# Altium PCB LED_ring.PcbDoc
Units mm, origin at the board's own origin, x right, y up, seen from the top; angles counter-clockwise.
Board outline 53 x 53 mm, 4 copper layers (Component Side, Ground Plane, Power Plane, Solder Side), stack 0.575 mm thick; 20 components, 16 nets, 135 pads, 5 vias.
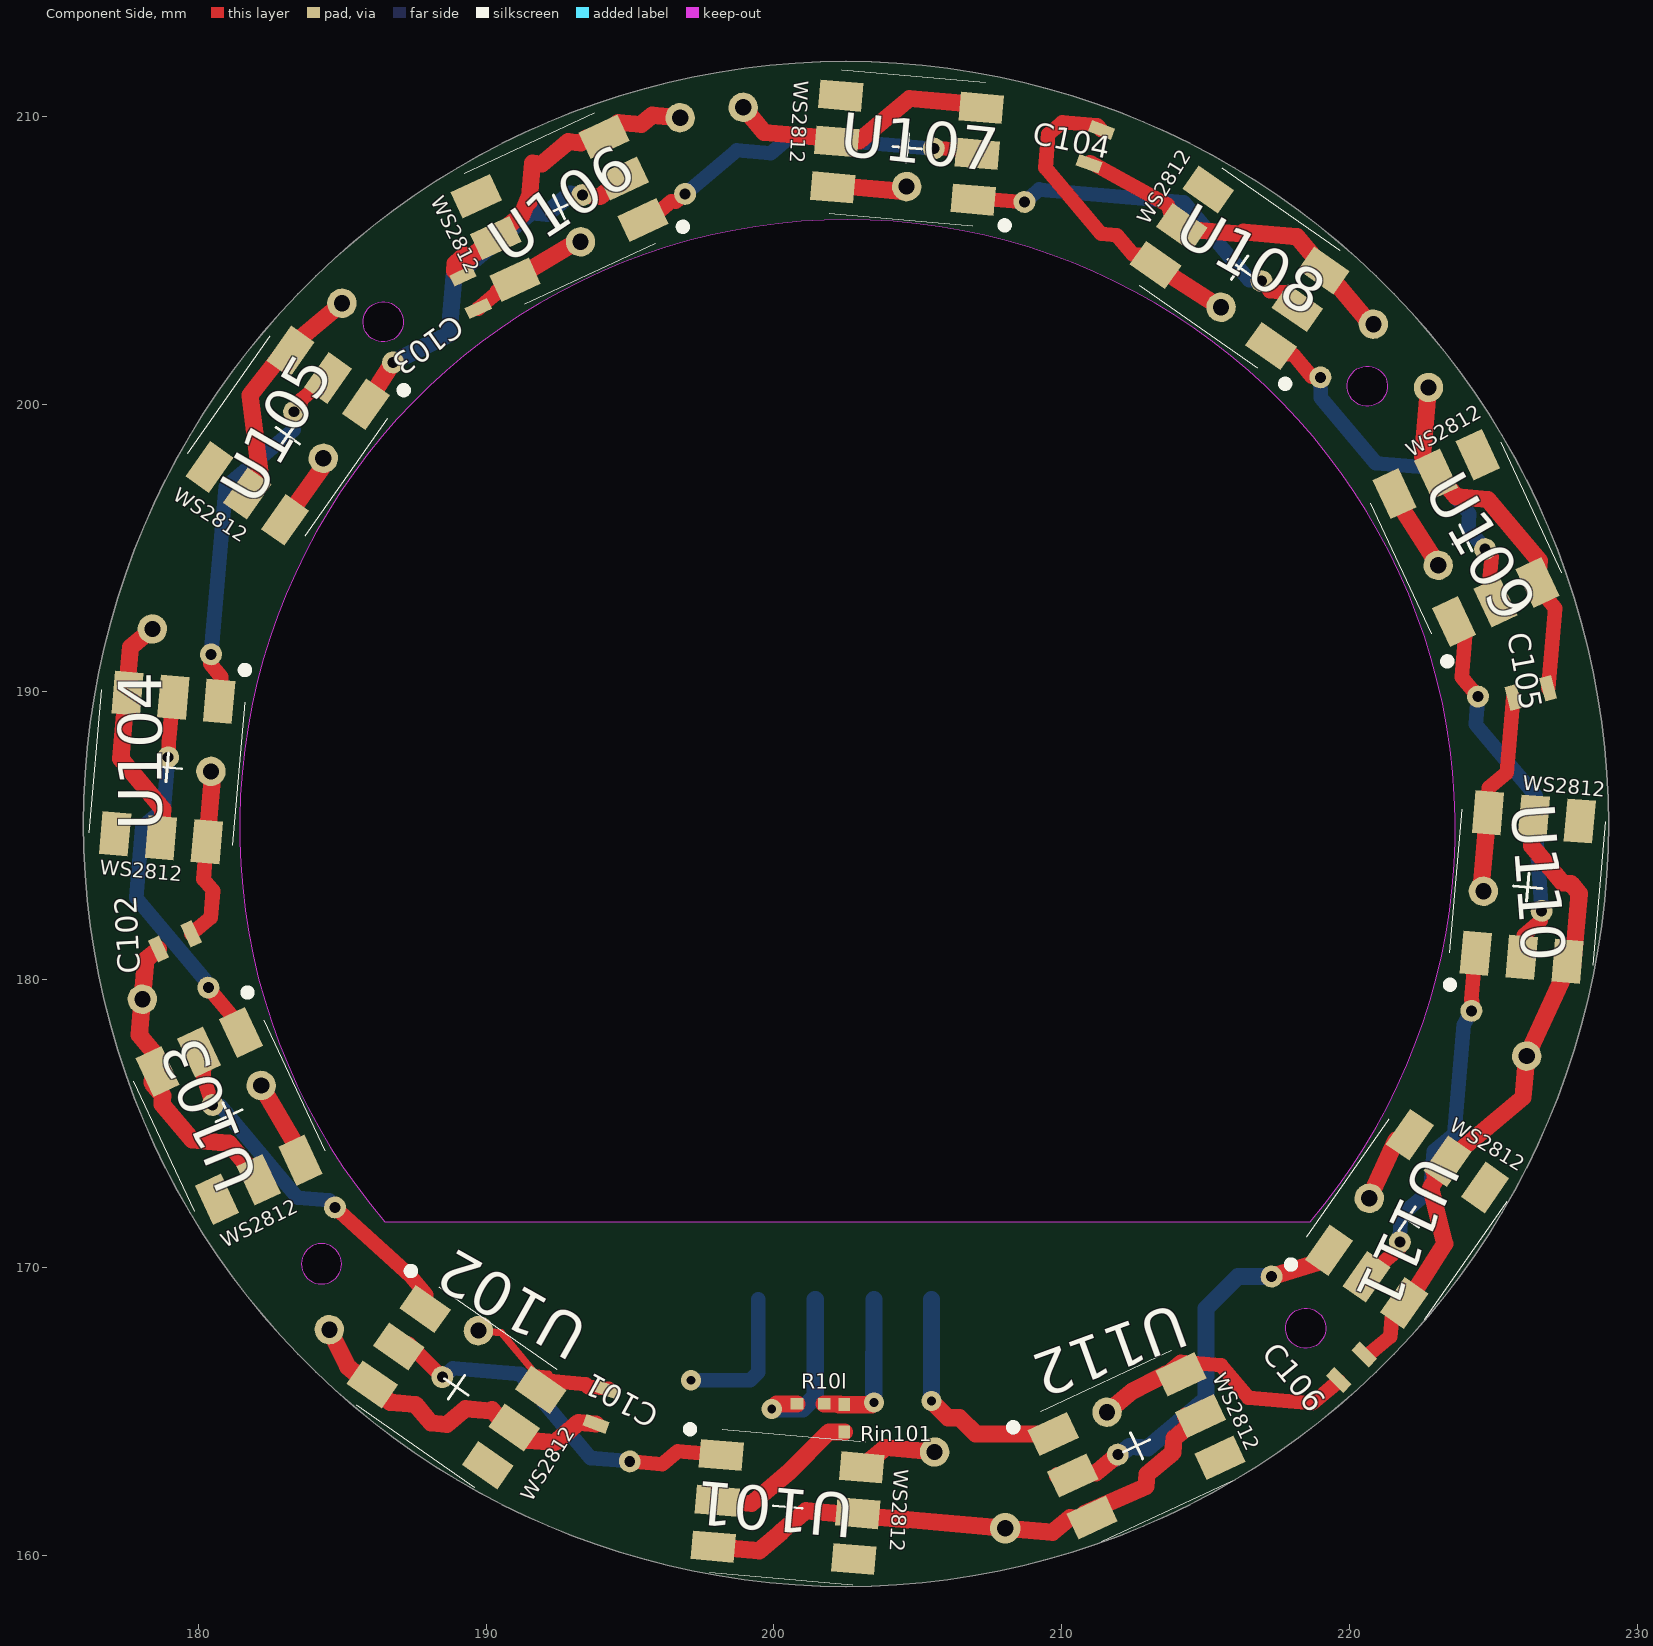
[diagram p0: Component Side view]
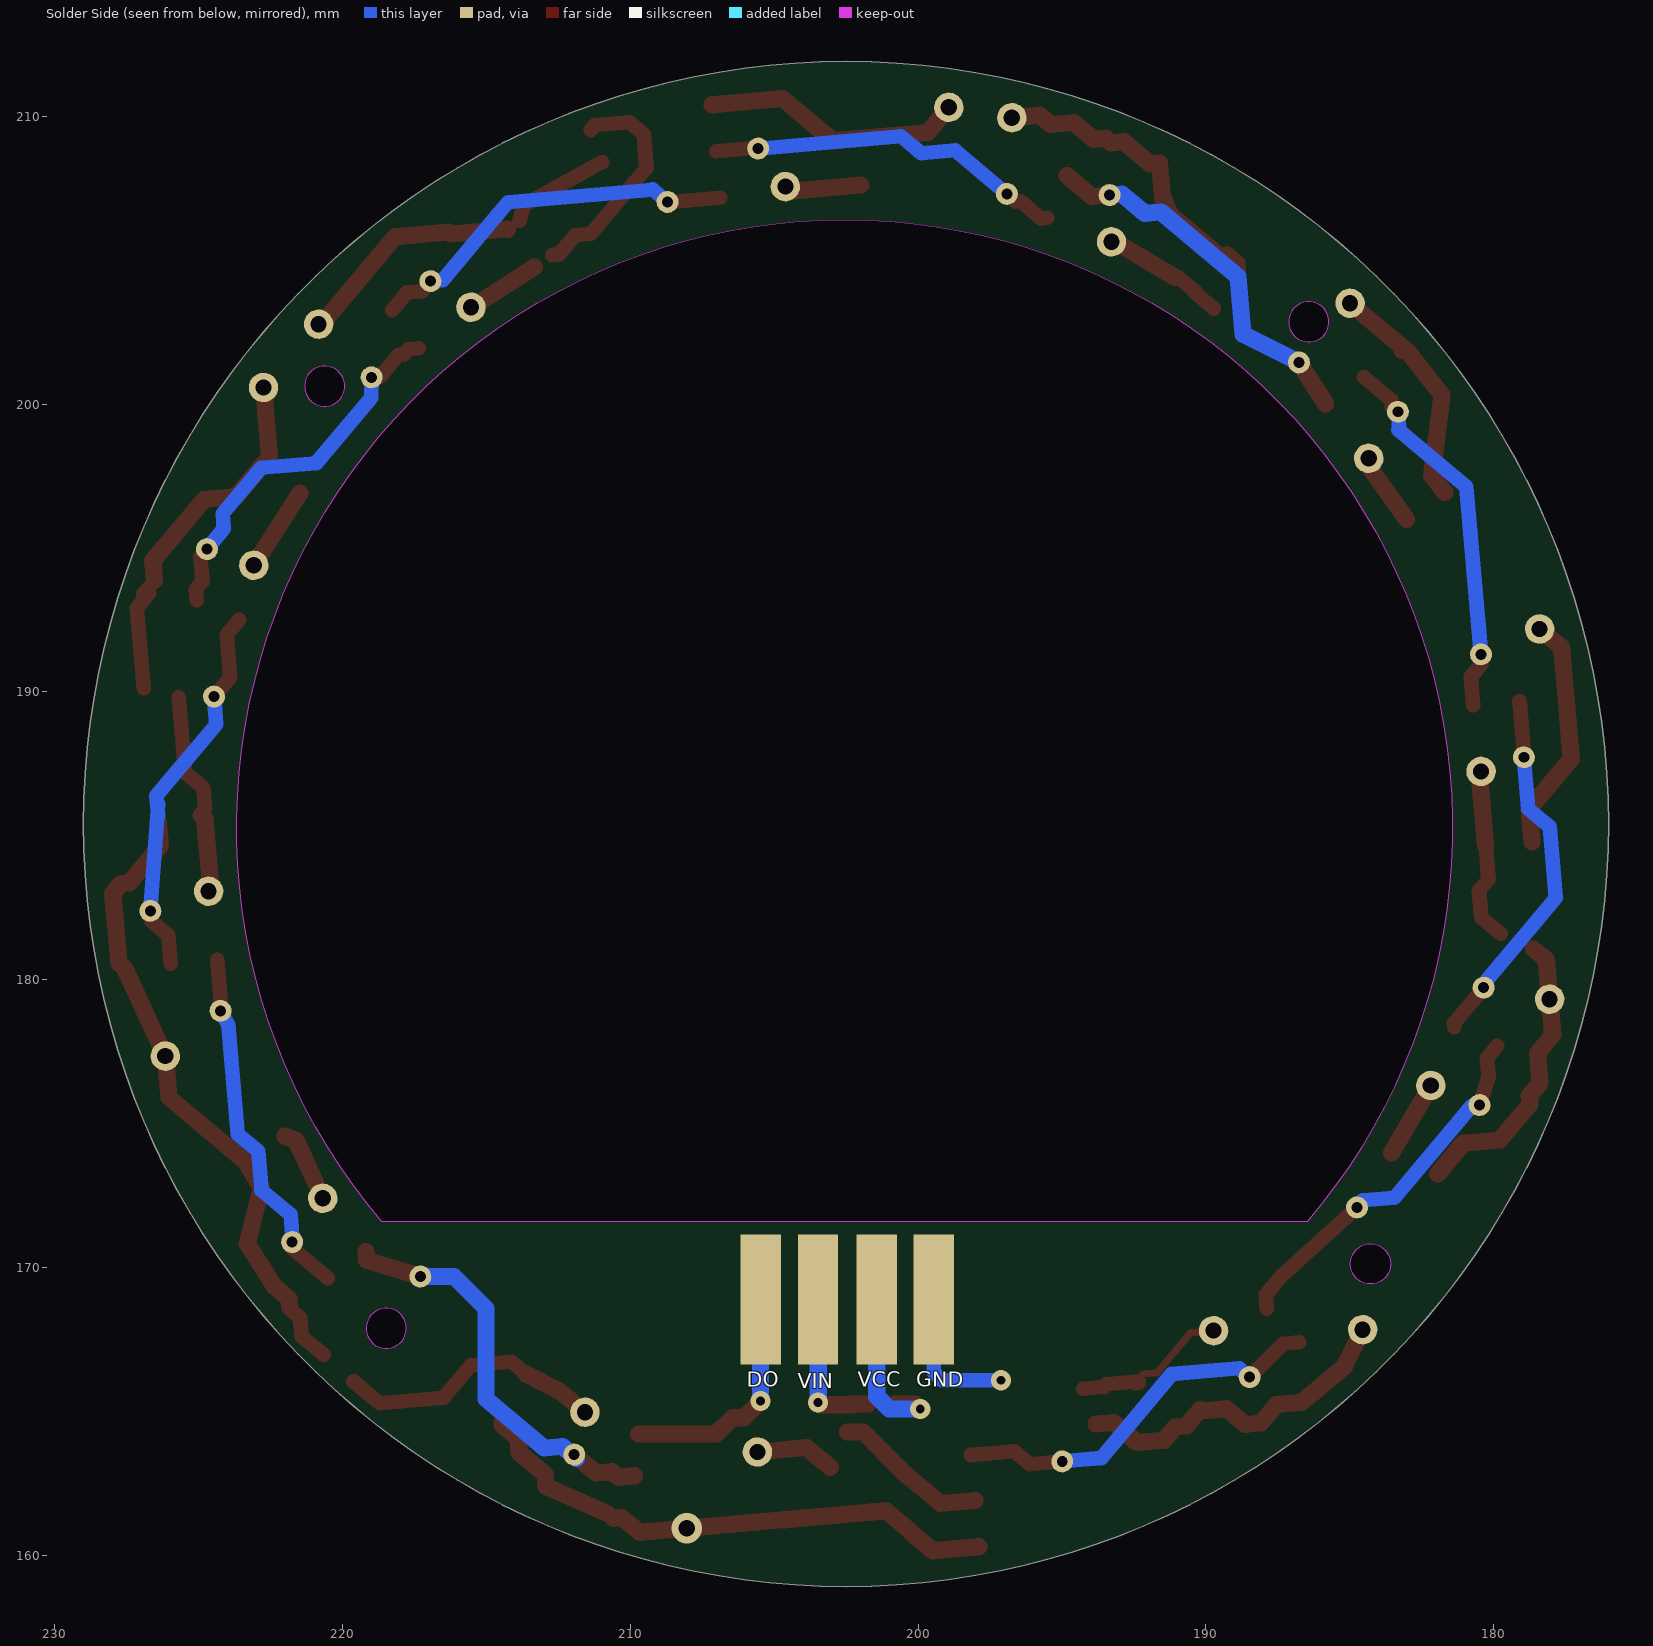
[diagram p1: Solder Side view, seen from below]
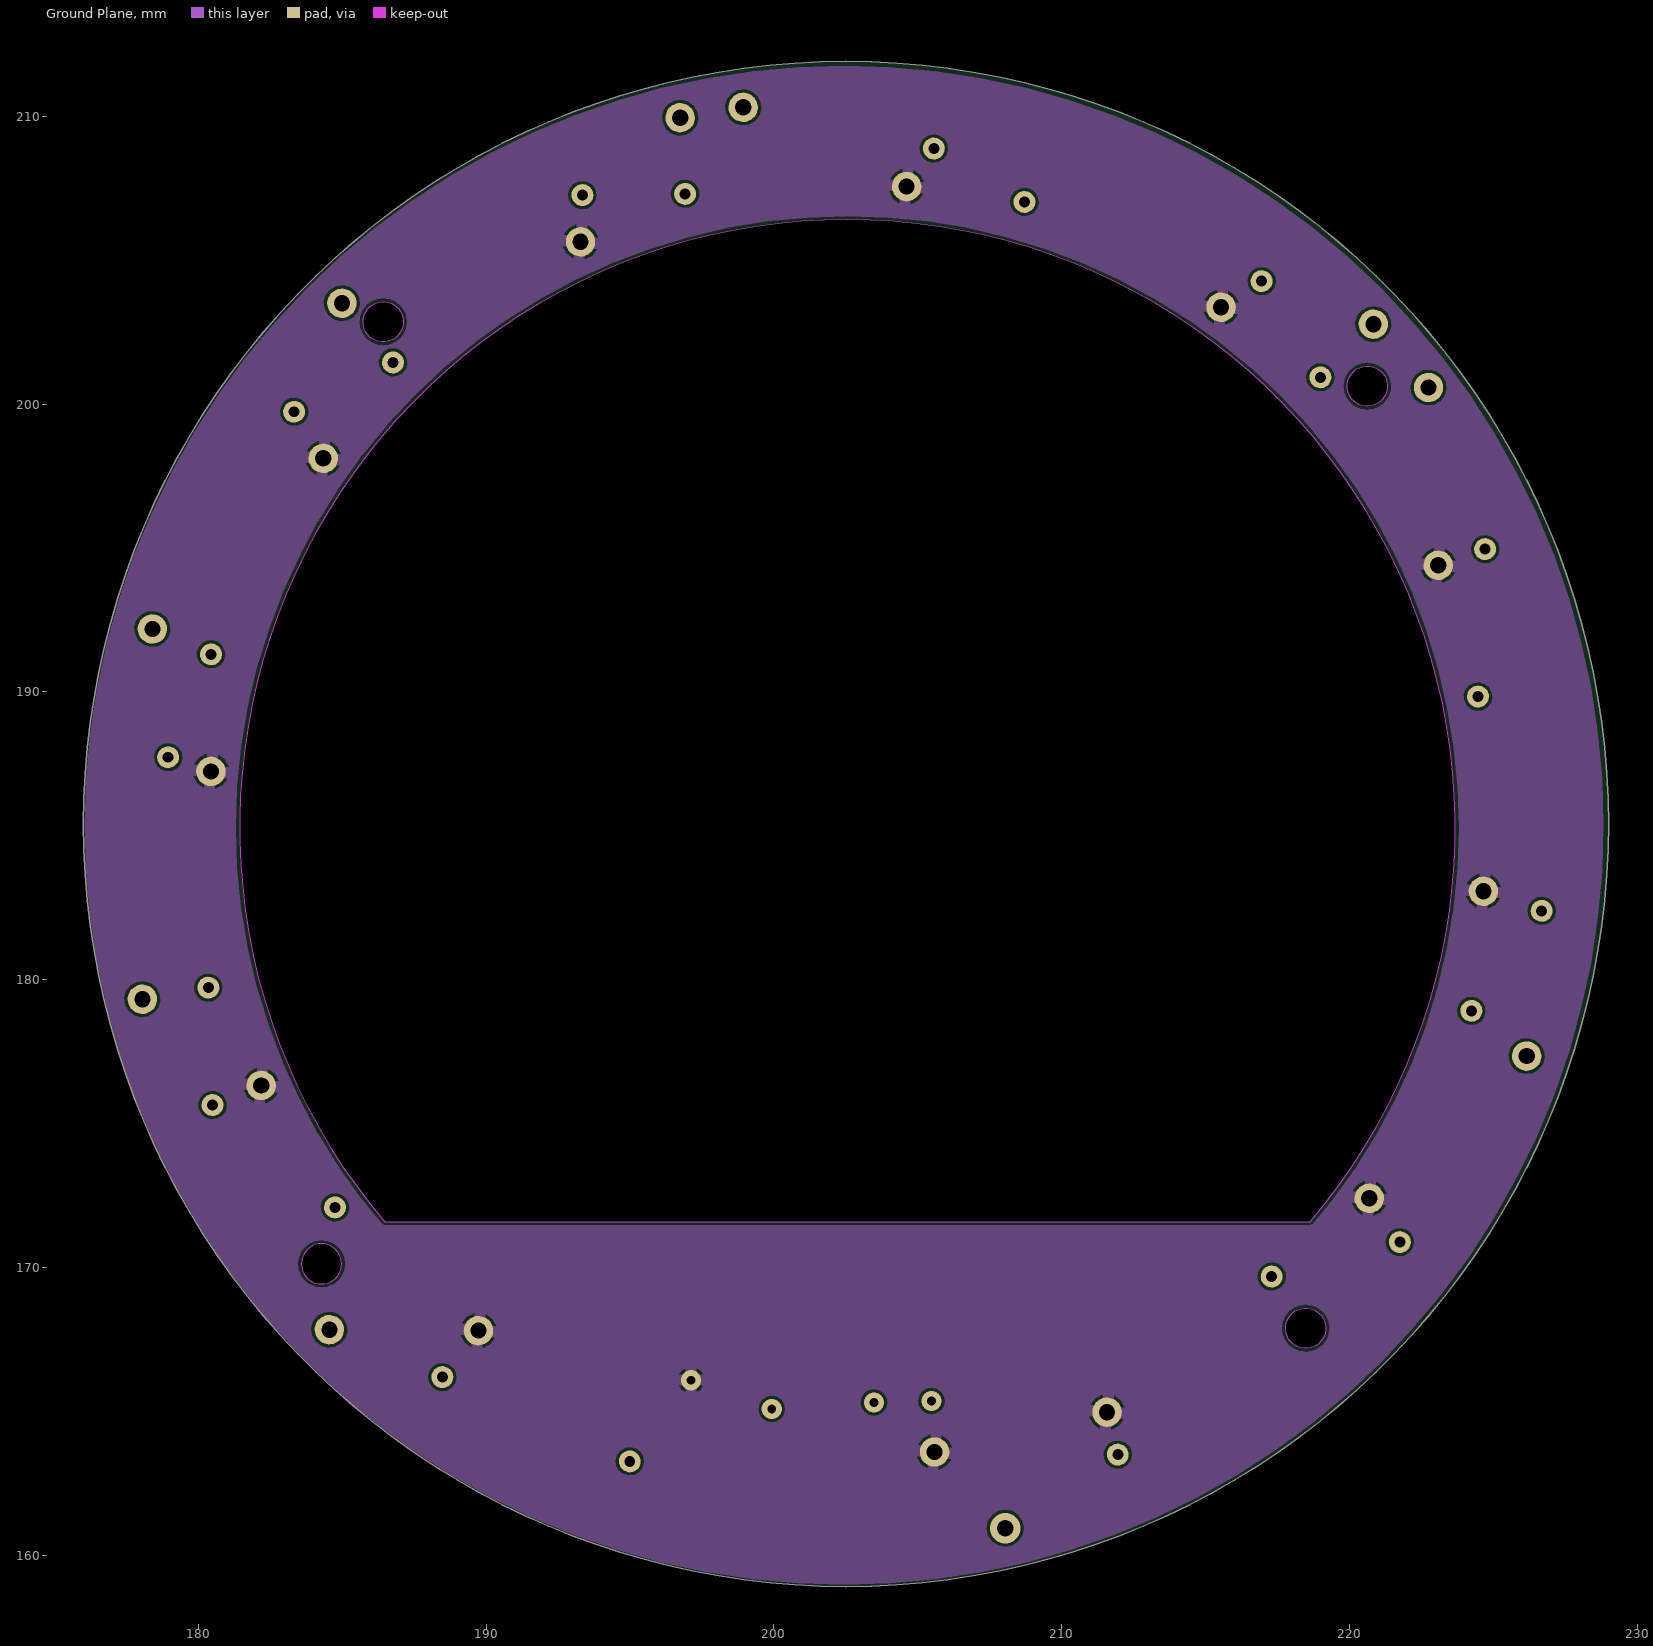
[diagram p2: Ground Plane]
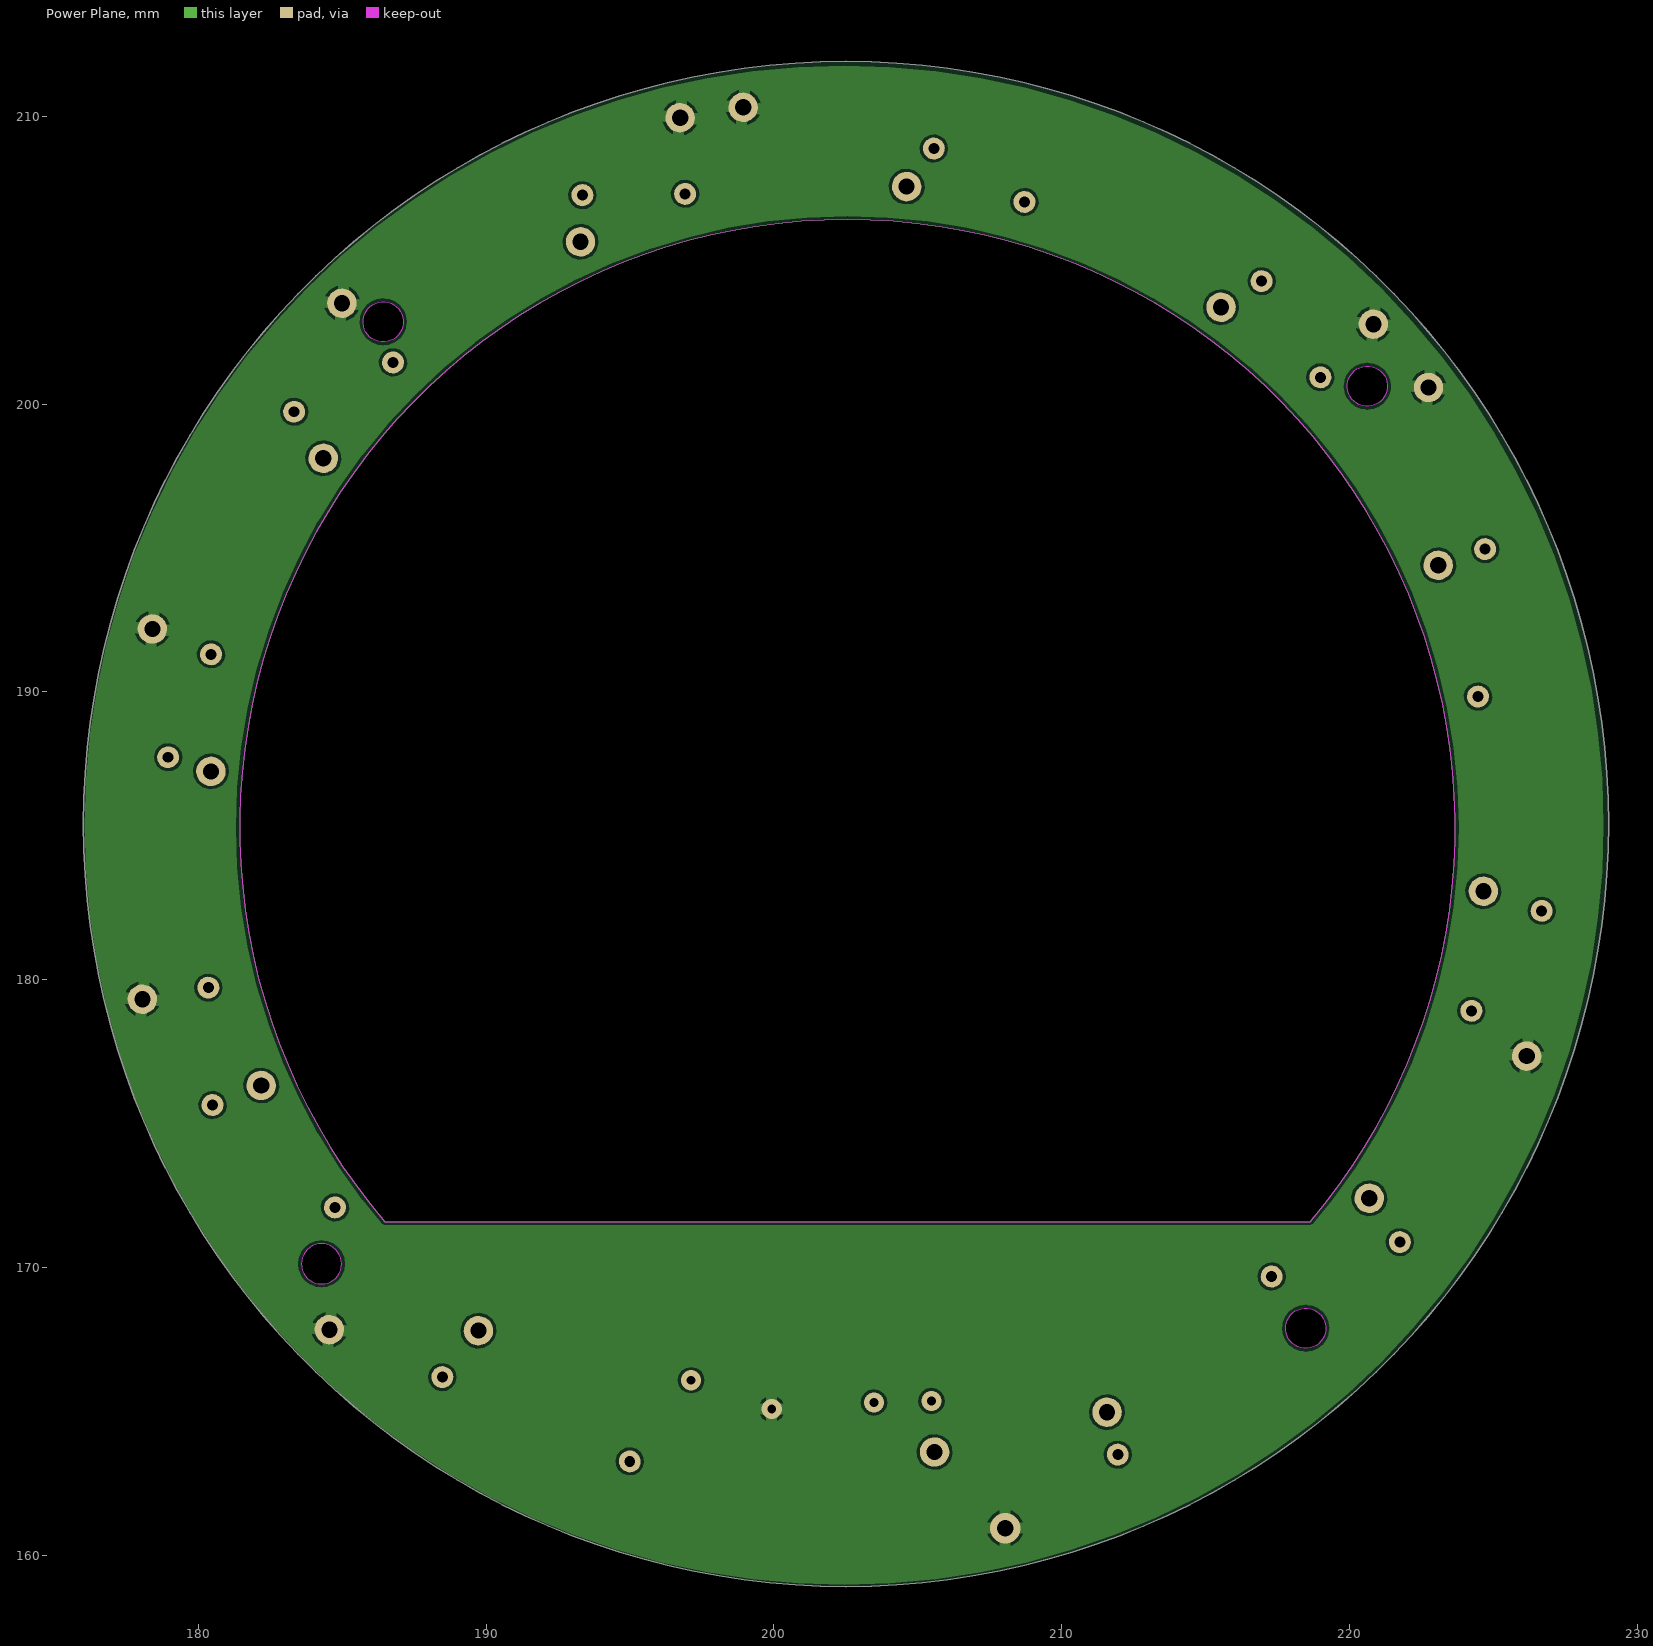
[diagram p3: Power Plane]

## Layer stack, top to bottom
Top Solder: solder mask 0.0102, Solder Resist, Dk 3.5
Component Side: signal copper 0.0356
Dielectric 1: core 0.1524, FR-4, Dk 4.8
Ground Plane: signal copper 0.036
Dielectric 2: prepreg 0.127, FR-4, Dk 4.8
Power Plane: signal copper 0.036
Dielectric 3: core 0.1524, FR-4, Dk 4.8
Solder Side: signal copper 0.0356
Bottom Solder: solder mask 0.0102, Solder Resist, Dk 3.5

## Board outline
202.506,158.906 cw(c202.506,185.406) 176.006,185.406 cw(c202.506,185.406) 202.506,211.906 cw(c202.506,185.406) 229.006,185.406 cw(c202.506,185.406)
cut-out: 183.578,170.12 ccw(c184.278,170.12) 184.278,169.42 ccw(c184.278,170.12) 184.978,170.12 ccw(c184.278,170.12) 184.278,170.82 ccw(c184.278,170.12)
cut-out: 186.472,171.587 218.638,171.587 ccw(c202.555,185.284)
cut-out: 218.421,167.184 cw(c218.482,167.882) 217.785,167.943 cw(c218.482,167.882) 218.543,168.579 cw(c218.482,167.882) 219.179,167.821 cw(c218.482,167.882)
cut-out: 220.563,199.924 cw(c220.624,200.621) 219.927,200.682 cw(c220.624,200.621) 220.685,201.318 cw(c220.624,200.621) 221.322,200.56 cw(c220.624,200.621)
cut-out: 186.36,202.162 cw(c186.421,202.859) 185.724,202.92 cw(c186.421,202.859) 186.482,203.557 cw(c186.421,202.859) 187.118,202.798 cw(c186.421,202.859)

## Design rules (kind name [scope] priority, off if disabled: settings)
AssemblyTestpoint [(IsPad And (OnTopLayer Or OnBottomLayer))] p1: testpointundercomponent=FALSE minsize=0.3 maxsize=2.54 preferedsize=0.6 minholesize=0 maxholesize=1.016 preferedholesize=0 testpointgrid=0.025 usegrid=TRUE gridtolerance=0 allowsidetop=TRUE allowsidebottom=TRUE minspacing=1 compbodyclearance=1 boardedgeclearance=1
Clearance Clearance_1 [All] p1: gap=0.1
Clearance "Polygon to board edge" [All vs OnLayer('Keep-Out Layer')] p2: gap=0.5
DiffPairsRouting [All] p1: maxlimit=0.254 minlimit=0.15 mostfreqgap=0.254 toplayer_prefgap=0.15 toplayer_minwidth=0.15 toplayer_maxwidth=0.381 toplayer_prefwidth=0.15 midlayer1_minwidth=0.15 midlayer1_maxwidth=0.381 midlayer1_prefwidth=0.381 midlayer2_minwidth=0.15 midlayer2_maxwidth=0.381 midlayer2_prefwidth=0.381 bottomlayer_prefgap=0.15 bottomlayer_minwidth=0.15 bottomlayer_maxwidth=0.381 bottomlayer_prefwidth=0.15 maxuncoupledlength=12.7
FabricationTestpoint [(IsPad And (OnTopLayer Or OnBottomLayer))] p1: side=3 testpointundercomponent=TRUE minsize=0.3 maxsize=2.54 preferedsize=0.6 minholesize=0 maxholesize=1.016 preferedholesize=0 testpointgrid=0.025 allowsidetop=TRUE allowsidebottom=TRUE usegrid=TRUE gridtolerance=0 minspacing=1 compbodyclearance=1 boardedgeclearance=1
FanoutControl Fanout_Default [All] p5: bgadir=Out bgaviamode=Centered fanoutstyle=Staggered fanoutdirection=Alternating viagrid=0.025 // Fanout_Default (Default Rule)
HoleSize [All] p1 off: absolutevalues=TRUE maxlimit=5 minlimit=0.35 maxpercent=80.000 minpercent=20.000
MinimumSolderMaskSliver [All] p1 off: minsoldermaskwidth=0.2
PasteMaskExpansion [All] p1: expansion=-0.05
PolygonConnect "Polygon Connect Net Tie" [(InComponentClass('Net Tie'))] p1: connectstyle=Direct reliefconductorwidth=0.254 reliefentries=4 polygonreliefangle="90 Angle" airgapwidth=0.254
PolygonConnect [All] p2: connectstyle=Relief reliefconductorwidth=0.4 reliefentries=4 polygonreliefangle="90 Angle" airgapwidth=0.1
RoutingCorners [All] p1: cornerstyle=45-Degree minsetback=1 maxsetback=5
RoutingVias "Power VIas" [InNetClass('Power')] p1: holewidth=0.2 width=0.4 viastyle="Through Hole" minholewidth=0.2 minwidth=0.4 maxholewidth=1 maxwidth=1
RoutingVias [All] p2: holewidth=0.2 width=0.4 viastyle="Through Hole" minholewidth=0.2 minwidth=0.4 maxholewidth=1 maxwidth=1
ShortCircuit "ShortCircuit between AGND and GND" [(InNet('GND')) vs (InNet('AGND'))] p1: allowed=TRUE
ShortCircuit [All] p2: allowed=FALSE
SilkToSolderMaskClearance [IsPad] p1 off: minsilkscreentomaskgap=0 clearancetoexposedcopper=TRUE
SolderMaskExpansion [All] p1: expansion=0.07
Width "Power width" [InNetClass('Power')] p1: maxlimit=2 minlimit=0.2 preferedwidth=1
Width LED [InNetClass('LED')] p2: maxlimit=0.15 minlimit=0.15 preferedwidth=0.15
Width TP [InNetClass('TP')] p3: maxlimit=0.15 minlimit=0.15 preferedwidth=0.15
Width [All] p4: maxlimit=2 minlimit=0.15 preferedwidth=0.15
19 further rules are at their usual default settings.

## Classes and differential pairs
differential pair class COMM_LINES: COMM

## Components (designator, comment, footprint, x,y, rotation, side; value= is the part's Value field where it differs from the comment)
C101 "6u" CAP0603 194.027,165.145 r250 top
C102 "6u" CAP0603 179.181,181.325 r205 top
C103 "6u" CAP0603 189.462,203.89 r115 top
C104 "6u" CAP0603 211.165,208.939 r250 top
C105 "6u" CAP0603 226.303,189.965 r15 top
C106 "6u" CAP0603 220.075,166.525 r45 top
R10l "2.7k" RES0402 201.275,165.25 r0 top
Rin101 "470" RES0402 202.45,164.75 r90 top
U101 "WS2812" 6PIN_WS2812 200.474,161.67 r175 top
U102 "WS2812" 6PIN_WS2812 188.968,165.838 r145 top
U103 "WS2812" 6PIN_WS2812 181.06,175.263 r115 top
U104 "WS2812" 6PIN_WS2812 178.915,187.372 r85 top
U105 "WS2812" 6PIN_WS2812 183.103,198.9 r55 top
U106 "WS2812" 6PIN_WS2812 192.553,206.807 r25 top
U107 "WS2812" 6PIN_WS2812 204.632,208.912 r355 top
U108 "WS2812" 6PIN_WS2812 216.187,204.739 r325 top
U109 "WS2812" 6PIN_WS2812 224.048,195.343 r295 top
U110 "WS2812" 6PIN_WS2812 226.199,183.21 r265 top
U111 "WS2812" 6PIN_WS2812 222.003,171.681 r235 top
U112 "WS2812" 6PIN_WS2812 212.605,163.795 r205 top

## Footprints (in the part's own frame and the unit in brackets; to place one, negate y for a bottom-side part, rotate by r counter-clockwise, add the part's x,y. Pads: shape width x height; smd on the part's side, far side on the other; paste and mask are expansions set on the pad)
6PIN_WS2812 [mm] "6-pin 5.4 x 5.4 x 1.5mm"
  rect 1.5x1 smd: 1(2.45,-1.6) 2(2.45,0) 3(2.45,1.6) 4(-2.45,1.6) 5(-2.45,0) 6(-2.45,-1.6)
  silkscreen extent -2.5,-2.52 3.74,2.5, body extent -2.51,-2.51 2.5,2.52, height 0.8
CAP0603 [mm] "Chip Capacitor, 2-Leads, Body 0603 / 1.60x0.8mm, IPC High Density"
  rect 0.425x0.85 smd: 1(-0.625,0) 2(0.625,0)
  body extent -0.8,-0.4 0.8,0.4, height 0.8
RES0402 [mm] "Chip resistor 0402 high density"
  rect 0.45x0.4 smd: 1(-0.475,0) 2(0.475,0)
  body extent -0.61,-0.2 0.6,0.2, height 0.5

## Part data
C101 C102 C103 C104 C105 C106: library part C_10u_10_6.3_X5R_0603, "Chip capacitor"
R10l: library part R_10k_0.5_0.063_0402, "Chip Resistor"
Rin101: library part R_475_1_0.1_0402, "Chip Resistor"
U101 U102 U103 U104 U105 U106 U107 U108 U109 U110 U111 U112: "WS2812 Intelligent control LED integrated light source"

## Free pads (board coordinates)
  round 1.024 hole 0.562: 0(211.578,164.964) 1(205.585,163.582) 1(222.749,200.576) 1(226.162,177.34) 2(189.732,167.798) 2(220.834,202.777) 3(182.181,176.32) 3(198.933,210.314) 4(180.434,187.235) 4(196.743,209.954) 5(184.339,198.115) 5(184.986,203.504) 6(178.399,192.185) 6(193.279,205.639) 7(178.051,179.316) 7(204.614,207.558) 8(184.55,167.831) 8(215.54,203.365) 9(223.087,194.398) 10(224.657,183.068) 11(220.691,172.398)
  round 0.762 hole 0.381: 14(178.946,187.726) 14(180.345,179.718) 14(180.438,191.304) 14(180.49,175.64) 14(183.326,199.734) 14(184.746,172.08) 14(186.763,201.447) 14(188.477,166.182) 14(193.346,207.264) 14(194.991,163.254) 14(196.913,207.304) 14(205.558,208.881) 14(208.708,207.025) 14(211.951,163.49) 14(216.949,204.271) 14(217.3,169.68) 14(218.991,200.93) 14(221.754,170.875) 14(224.242,178.914) 14(224.47,189.835) 14(224.717,194.958) 14(226.684,182.389)
  rect 1.4x4.524 smd far side: AGND(199.456,168.882) DO(205.468,168.883) VCC(201.438,168.882) VI(203.482,168.883)

## Via types
v1: diameter 0.7, hole 0.311, Component Side to Solder Side, 4 vias
v2: diameter 1.07, hole 0.562, Component Side to Solder Side, 1 vias

## Nets (pads, with @x,y where several pads share a name; then routed paths per layer and width w, separated by ;. In a path a pad name is that pad's centre, name@x,y a point inside that pad or via, vN(x,y) a via of type N, cw(c..) or ccw(c..) an arc to the next point about the centre after c; other vN are vias at no path point)
AGND: C101.1 C102.1 C103.1 C104.1 C105.1 C106.1 pad.0 pad.1@205.585,163.582 pad.2@189.732,167.798 pad.3@182.181,176.32 pad.4@180.434,187.235 pad.5@184.339,198.115 pad.6@193.279,205.639 pad.7@204.614,207.558 pad.8@215.54,203.365 pad.9 pad.10 pad.11 pad.AGND U101.6 U102.6 U103.6 U104.6 U105.6 U106.6 U107.6 U108.6 U109.6 U110.6 U111.6 U112.6 | length 63.4
  Component Side w0.254: pad.2@189.732,167.798 190.52,167.729 191.691,166.333 192.173,166.291
  Component Side w0.508: C102.1 180.424,182.158 180.506,183.092 ; U104.6@180.278,184.657 180.176,183.485 180.47,183.135 ; C103.1 190.421,203.907 190.367,203.911 U106.6@190.964,204.412 ; 192.433,165.981 192.334,165.99 192.338,166.039 193.464,165.941 193.547,165.841 C101.1@194.258,165.779 ; C104.1 211.241,209.691 210.032,209.797 209.542,209.386 209.44,208.215 211.371,205.913 211.919,205.865 212.487,205.188 212.712,205.169 U108.6@212.689,205.196 ; U112.6@213.613,166.285 214.135,166.723 215.538,166.601 216.492,165.463 218.707,165.269 C106.1@219.621,166.037 ; U110.6@224.965,185.715 224.781,185.933 224.845,186.666 225.471,187.191 C105.1
  Component Side w0.6: U104.6@180.278,184.657 pad.4@180.497,187.159 ; pad.3@182.181,176.32 U103.6@183.549,173.972 ; U105.6@183.023,196.002 pad.5@184.471,198.02 ; U106.6@191.063,204.404 pad.6@193.238,205.707 ; U107.6@201.989,207.611 pad.7@204.423,207.398 ; U101.6 203.872,163.734 pad.1@205.585,163.582 ; pad.0 212.418,165.669 U112.6@213.613,166.285 ; U108.6@213.342,204.751 pad.8@215.533,203.353 ; pad.11 221.622,174.417 U111.6@222.006,174.558 ; U109.6@221.484,196.904 pad.9 ; pad.10 224.579,183.162 U110.6@224.789,185.567
  Solder Side w0.508: v1(197.125,166.075) 199.173,166.075 199.456,166.358 pad.AGND
DI: Rin101.1 U101.2 | length 5.4
  Component Side w0.6: U101.2@198.029,161.898 199.219,161.794 200.531,162.894 201.911,164.275 Rin101.1
DO: pad.DO U112.1 | length 8.2
  Component Side w0.6: v1(205.475,165.35) 206.05,164.775 206.45,164.775 207.015,164.21 U112.1
  Solder Side w0.6: v1(205.475,165.35) pad.DO@205.475,168.883
NetU101_1: pad.14@188.477,166.182 pad.14@194.991,163.254 U101.1 U102.2 | length 15.2
  Component Side w0.508: U102.2@186.755,167.393 U102.2@187.308,167.345 ; pad.14@194.991,163.254 196.115,163.155 196.657,163.61 U101.1 ; U102.2@187.308,167.345 188.477,166.182 U102.2@187.308,167.345
  Solder Side w0.508: pad.14@188.477,166.182 188.849,166.495 191.181,166.291 193.63,163.373 pad.14@194.991,163.254
NetU102_1: pad.14@180.49,175.64 pad.14@184.746,172.08 U102.1 U103.2 | length 12.9
  Component Side w0.508: U103.2@179.874,177.696 180.231,177.27 180.172,176.596 pad.14@180.47,175.701 ; pad.14@184.746,172.08 187.378,169.692 187.922,169.043 U102.1
  Solder Side w0.508: pad.14@180.49,175.64 180.764,175.616 183.446,172.42 184.542,172.324 pad.14@184.746,172.08
NetU103_1: pad.14@178.946,187.726 pad.14@180.345,179.718 U103.1 U104.2 | length 13
  Component Side w0.508: pad.14@178.946,187.726 178.973,188.234 U104.2@179.099,189.677 ; pad.14@180.345,179.718 181.379,178.486 U103.1@181.367,178.351
  Solder Side w0.508: pad.14@178.946,187.726 178.788,185.927 178.049,185.306 177.833,182.849 180.242,179.978 pad.14@180.345,179.718
NetU104_1: pad.14@180.438,191.304 pad.14@183.326,199.734 U104.1 U105.2 | length 13.2
  Component Side w0.508: pad.14@180.438,191.304 180.41,190.978 180.797,190.516 U104.1@180.712,189.541 ; pad.14@183.326,199.734 183.541,199.915 183.561,200.142 U105.2@184.511,200.939
  Solder Side w0.508: pad.14@180.438,191.304 180.948,197.129 183.309,199.11 183.275,199.15 pad.14@183.326,199.734
NetU105_1: pad.14@186.763,201.447 pad.14@193.346,207.264 U105.1 U106.2 | length 13.2
  Component Side w0.6: U105.1@185.84,200.015 pad.14@186.763,201.447 ; pad.14@193.301,207.268 193.346,207.264 193.958,207.211 U106.2@194.821,207.935
  Solder Side w0.6: pad.14@186.763,201.447 188.706,202.419 188.881,204.429 191.563,206.679 192.122,206.63 192.922,207.302 pad.14@193.301,207.268
NetU106_1: pad.14@196.913,207.304 pad.14@205.558,208.881 U106.1 U107.2 | length 12.9
  Component Side w0.508: U106.1@195.51,206.47 195.731,206.451 196.438,207.044 196.588,207.031 196.913,207.304 pad.14@196.693,207.119 ; pad.14@205.558,208.881 205.596,208.914 U107.2@207.009,208.79
  Solder Side w0.508: pad.14@196.913,207.304 198.714,208.815 199.884,208.713 200.602,209.315 pad.14@205.558,208.881
NetU107_1: pad.14@208.708,207.025 pad.14@216.949,204.271 U107.1 U108.2 | length 13.3
  Component Side w0.508: U107.1@206.873,207.177 208.699,207.017 pad.14@208.708,207.025 ; pad.14@216.949,204.271 217.24,203.925 217.762,203.879 U108.2@218.279,203.263
  Solder Side w0.508: pad.14@208.699,207.017 209.223,207.456 214.25,207.017 214.636,206.556 216.522,204.308 pad.14@216.949,204.271
NetU108_1: pad.14@218.991,200.93 pad.14@224.717,194.958 U108.1 U109.2 | length 13.1
  Component Side w0.508: U108.1@217.355,201.934 217.723,201.902 217.866,201.731 218.056,201.715 218.692,200.956 pad.14@218.991,200.93 ; pad.14@224.717,194.958 224.942,194.691 224.867,193.837 225.1,193.56 U109.2@225.067,193.184
  Solder Side w0.508: pad.14@218.991,200.93 219.005,200.226 220.914,197.951 222.831,197.784 224.172,196.186 224.126,195.663 pad.14@224.717,194.958
NetU109_1: pad.14@224.47,189.835 pad.14@226.684,182.389 U109.1 U110.2 | length 13.8
  Component Side w0.508: U109.1@223.602,192.496 224.033,191.982 223.904,190.509 pad.14@224.47,189.835 ; U110.2@225.968,180.547 226.055,181.543 226.654,182.045 pad.14@226.684,182.389
  Solder Side w0.508: pad.14@224.47,189.835 224.386,188.872 226.475,186.382 226.414,185.693 ; 226.404,186.111 pad.14@226.684,182.389
NetU110_1: pad.14@221.754,170.875 pad.14@224.242,178.914 U110.1 U111.2 | length 12.5
  Component Side w0.508: U111.2@220.517,169.621 221.733,170.642 pad.14@221.754,170.875 ; pad.14@224.242,178.914 224.272,179.253 224.234,179.298 U110.1@224.356,180.683
  Solder Side w0.508: pad.14@221.754,170.875 221.745,171.096 221.809,171.825 222.818,172.672 222.937,174.034 223.641,174.625 223.974,178.435 pad.14@224.242,178.914
NetU111_1: pad.14@211.951,163.49 pad.14@217.3,169.68 U111.1 U112.2 | length 14.6
  Component Side w0.6: U112.2@209.855,162.754 210.416,162.704 210.646,162.898 211.188,162.85 pad.14@211.951,163.49 ; pad.14@217.3,169.68 219.162,170.243 U111.1@219.188,170.545
  Solder Side w0.6: pad.14@211.951,163.49 211.87,163.358 212.368,163.775 212.991,163.721 215.019,165.422 215.019,168.569 216.13,169.68 pad.14@217.3,169.68
VCC: C101.2 C102.2 C103.2 C104.2 C105.2 C106.2 pad.1@222.749,200.576 pad.1@226.162,177.34 pad.2@220.834,202.777 pad.3@198.933,210.314 pad.4@196.743,209.954 pad.5@184.986,203.504 pad.6@178.399,192.185 pad.7@178.051,179.316 pad.8@184.55,167.831 pad.VCC R10l.1 U101.3 U101.5 U102.3 U102.5 U103.3 U103.5 U104.3 U104.5 U105.3 U105.5 U106.3 U106.5 U107.3 U107.5 U108.3 U108.5 U109.3 U109.5 U110.3 U110.5 U111.3 U111.5 U112.3 U112.5 | length 131.6
  Component Side w0.508: C104.2@210.983,208.408 213.692,206.92 U108.5@213.852,206.373 ; C106.2@220.663,166.956 221.425,167.595 221.424,167.595 221.48,168.244 U111.3@221.876,168.576 ; 221.452,167.965 221.456,167.969 ; U109.3@226.537,193.867 U109.3@226.919,193.413 ; U109.3@226.717,193.428 227.151,192.911 C105.2
  Component Side w0.6: U104.3@177.484,189.82 U104.3@177.486,189.822 ; pad.6@178.399,192.185 177.641,191.548 177.638,191.552 U104.3@177.486,189.822 ; C102.2 178.172,180.69 178.051,179.316 177.943,178.071 178.472,177.44 178.383,176.419 178.762,175.966 178.736,175.668 179.781,174.422 181.05,174.311 U103.5@181.941,173.25 ; U104.5@178.666,184.793 178.765,185.929 178.76,185.929 177.298,187.672 U104.3@177.486,189.822 ; U105.5@181.694,196.926 182.148,197.512 181.793,200.305 U105.3@182.953,201.803 ; U105.3@183.184,201.871 U105.3@182.953,201.803 ; pad.8@184.55,167.831 185.191,166.545 186.664,165.312 187.536,165.236 188.082,164.586 188.632,164.538 189.282,165.083 190.154,165.007 190.203,165.048 190.675,164.484 191.058,164.451 191.444,163.99 192.386,163.908 193.221,164.609 C101.2 ; pad.5@184.986,203.504 U105.3@182.953,201.803 ; 189.26,205.172 188.922,204.888 188.899,204.63 191.227,206.584 191.223,206.539 191.225,206.54 191.51,207.224 ; 191.492,207.014 191.61,208.37 191.934,208.342 192.855,209.114 193.289,209.076 193.479,209.235 193.892,209.199 194.596,209.79 195.392,209.72 195.772,210.039 pad.4@196.743,209.954 ; U101.3 199.488,160.15 200.268,160.805 200.243,160.807 201.112,161.536 204.624,161.229 204.626,161.231 v2(208.038,160.933) 209.682,160.789 210.296,161.304 U112.3@210.575,161.28 ; pad.3@198.933,210.314 199.667,209.439 202.963,209.15 204.713,210.619 U107.3@207.152,210.405 ; v1(199.925,165.075) 200.1,165.25 R10l.1 ; U112.3@210.793,161.444 212.934,162.386 212.971,162.81 213.864,163.56 213.908,164.058 214.45,164.512 214.46,164.63 U112.5@214.301,164.82 ; U108.5@214.267,206.08 216.236,205.908 216.321,205.979 218.182,205.816 220.724,202.786 pad.2@220.834,202.777 ; U111.3@221.844,168.689 221.863,168.907 222.375,169.337 223.319,170.82 222.824,172.758 U111.5@223.32,173.593 ; pad.1@222.749,200.576 222.54,198.179 223.716,196.778 224.813,196.682 226.597,194.555 U109.3@226.537,193.867 ; U111.5@222.949,173.31 226.036,175.901 226.162,177.34 227.583,180.404 227.774,180.564 227.987,182.994 227.706,183.329 227.416,183.354 226.333,184.645 U110.5@226.402,185.431
  Solder Side w0.6: v1(199.925,165.075) 201,165.075 201.438,165.513 pad.VCC
VIN: pad.VI R10l.2 Rin101.2 | length 5.4
  Component Side w0.6: R10l.2 202.285,165.25 202.26,165.225 Rin101.2 203.4,165.225 v1(203.475,165.3)
  Solder Side w0.6: v1(203.475,165.3) pad.VI
pads on no net: U101.4 U102.4 U103.4 U104.4 U105.4 U106.4 U107.4 U108.4 U109.4 U110.4 U111.4 U112.4

## Polygon pours and split planes (outlines as drawn)
no net on Power Plane "Power Plane-No Net" (none, pour order 7): 186.472,171.587 218.638,171.587 ccw(c202.555,185.284)
VCC on Power Plane "Power Plane-No Net" (solid, pour order 5): 200.216,158.938 cw(c202.526,185.337) 176.127,187.647 cw(c202.526,185.337) 204.835,211.736 cw(c202.526,185.337) 228.925,183.028 cw(c202.526,185.337)
AGND on Ground Plane "Power Plane-No Net" (solid, pour order 6): 200.216,158.938 cw(c202.526,185.337) 176.127,187.647 cw(c202.526,185.337) 204.835,211.736 cw(c202.526,185.337) 228.925,183.028 cw(c202.526,185.337)
AGND on Ground Plane "Power Plane-No Net" (solid, pour order 8): 200.216,158.938 cw(c202.525,185.337) 176.126,187.647 cw(c202.525,185.337) 204.835,211.736 cw(c202.525,185.337) 228.925,183.028 cw(c202.525,185.337)

## Keep-outs
Drill Drawing:
  circle w0.03: c202.439,185.365 r26.5
  circle w0.03: c186.409,202.855 r0.7
  circle w0.03: c220.613,200.615 r0.7
  circle w0.03: c218.475,167.875 r0.7
  circle w0.03: c184.275,170.125 r0.7
  lines w0.03: 186.472,171.587 cw(c202.555,185.284) 218.638,171.587 217.835,171.587 217.43,171.587 186.472,171.587

## Other copper
Ground Plane:
  pour cut-out: 184.214,169.425 cw(c184.275,170.122) 183.578,170.183 cw(c184.275,170.122) 184.336,170.82 cw(c184.275,170.122) 184.972,170.061 cw(c184.275,170.122)
  pour cut-out: 218.414,167.171 cw(c218.475,167.869) 217.778,167.93 cw(c218.475,167.869) 218.536,168.566 cw(c218.475,167.869) 219.172,167.808 cw(c218.475,167.869)
  pour cut-out: 220.563,199.924 cw(c220.624,200.621) 219.927,200.682 cw(c220.624,200.621) 220.685,201.318 cw(c220.624,200.621) 221.322,200.56 cw(c220.624,200.621)
  pour cut-out: 186.36,202.162 cw(c186.421,202.859) 185.724,202.92 cw(c186.421,202.859) 186.482,203.557 cw(c186.421,202.859) 187.118,202.798 cw(c186.421,202.859)
Power Plane:
  pour cut-out: 186.472,171.587 218.638,171.587 ccw(c202.555,185.284)
Multi-Layer:
  pour cut-out: 186.36,202.162 cw(c186.421,202.859) 185.724,202.92 cw(c186.421,202.859) 186.482,203.557 cw(c186.421,202.859) 187.118,202.798 cw(c186.421,202.859)
  pour cut-out: 184.214,169.425 cw(c184.275,170.122) 183.578,170.183 cw(c184.275,170.122) 184.336,170.82 cw(c184.275,170.122) 184.972,170.061 cw(c184.275,170.122)
  pour cut-out: 218.414,167.171 cw(c218.475,167.869) 217.778,167.93 cw(c218.475,167.869) 218.536,168.566 cw(c218.475,167.869) 219.172,167.808 cw(c218.475,167.869)
  pour cut-out: 220.563,199.924 cw(c220.624,200.621) 219.927,200.682 cw(c220.624,200.621) 220.685,201.318 cw(c220.624,200.621) 221.322,200.56 cw(c220.624,200.621)

## Silkscreen, mask and mechanical layers (free items; w line width, h text height)
Bottom Overlay:
  text "GND" at 200.072,165.85 h0.52
  text "VCC" at 202.097,165.85 h0.52
  text "DO" at 205.95,165.85 h0.52
  text "VIN" at 204.175,165.8 h0.52
Mechanical 1:
  drawing of 1907 lines, arcs and shapes, not listed
Mechanical 13:
  lines w0.054: 186.472,171.533 186.472,171.641 ; 186.996,171.413 186.472,171.587 ; 186.996,171.762 186.472,171.587 ; 189.64,171.587 186.472,171.587 ; 195.517,171.587 198.685,171.587 ; 198.161,171.412 198.685,171.587 ; 198.161,171.762 198.685,171.587 ; 198.51,170.683 198.685,171.207 ; 198.51,172.111 198.685,171.587 ; 198.631,171.207 198.739,171.207 ; 198.631,171.587 198.739,171.587 ; 198.685,168.667 198.685,171.207 ; 198.685,171.533 198.685,171.641 ; 198.685,174.127 198.685,171.587 ; 198.86,170.683 198.685,171.207 ; 198.86,172.111 198.685,171.587 ; 206.39,171.533 206.39,171.641 ; 206.914,171.413 206.39,171.587 ; 206.914,171.762 206.39,171.587 ; 209.532,171.587 206.39,171.587 ; 215.496,171.587 218.638,171.587 ; 218.114,171.413 218.638,171.587 ; 218.114,171.762 218.638,171.587 ; 218.638,171.533 218.638,171.641
  text "12.213 (mm)" at 189.894,171.173 h0.52
  text "12.248 (mm)" at 209.786,171.173 h0.52
  text "0.38 (mm)" at 200.342,169.149 h0.52 r90
Drill Drawing:
  drawing of 372 lines, arcs and shapes, not listed
  text "Layer" at 230.875,252.376 h1.52
  text "Name" at 241.287,252.376 h1.52
  text "Material" at 265.156,252.376 h1.52
  text "Thickness" at 286.994,252.376 h1.52
  text "Constant" at 303.5,252.376 h1.52
  text "Board Layer Stack" at 317.975,252.376 h1.52
  text "1" at 230.875,249.328 h1.52
  text "Top Paste" at 241.287,249.328 h1.52
  text "2" at 230.875,246.28 h1.52
  text "Top Overlay" at 241.287,246.28 h1.52
  text "3" at 230.875,243.232 h1.52
  text "Top Solder" at 241.287,243.232 h1.52
  text "Solder Resist" at 265.156,243.232 h1.52
  text "0.40mil" at 286.994,243.232 h1.52
  text "3.5" at 303.5,243.232 h1.52
  text "4" at 230.875,240.184 h1.52
  text "Component Side" at 241.287,240.184 h1.52
  text "Copper" at 265.156,240.184 h1.52
  text "1.40mil" at 286.994,240.184 h1.52
  text "5" at 230.875,237.136 h1.52
  text "Dielectric 1" at 241.287,237.136 h1.52
  text "FR-4" at 265.156,237.136 h1.52
  text "6.00mil" at 286.994,237.136 h1.52
  text "4.8" at 303.5,237.136 h1.52
  text "6" at 230.875,234.088 h1.52
  text "Ground Plane" at 241.287,234.088 h1.52
  text "Copper" at 265.156,234.088 h1.52
  text "1.42mil" at 286.994,234.088 h1.52
  text "7" at 230.875,231.04 h1.52
  text "Dielectric 2" at 241.287,231.04 h1.52
  text "FR-4" at 265.156,231.04 h1.52
  text "5.00mil" at 286.994,231.04 h1.52
  text "4.8" at 303.5,231.04 h1.52
  text "8" at 230.875,227.992 h1.52
  text "Power Plane" at 241.287,227.992 h1.52
  text "Copper" at 265.156,227.992 h1.52
  text "1.42mil" at 286.994,227.992 h1.52
  text "9" at 230.875,224.944 h1.52
  text "Dielectric 3" at 241.287,224.944 h1.52
  text "FR-4" at 265.156,224.944 h1.52
  text "6.00mil" at 286.994,224.944 h1.52
  text "4.8" at 303.5,224.944 h1.52
  text "10" at 230.875,221.896 h1.52
  text "Solder Side" at 241.287,221.896 h1.52
  text "Copper" at 265.156,221.896 h1.52
  text "1.40mil" at 286.994,221.896 h1.52
  text "11" at 230.875,218.848 h1.52
  text "Bottom Solder" at 241.287,218.848 h1.52
  text "Solder Resist" at 265.156,218.848 h1.52
  text "0.40mil" at 286.994,218.848 h1.52
  text "3.5" at 303.5,218.848 h1.52
  text "12" at 230.875,215.8 h1.52
  text "Bottom Overlay" at 241.287,215.8 h1.52
  text "13" at 230.875,212.752 h1.52
  text "Bottom Paste" at 241.287,212.752 h1.52
  text "Symbol" at 245.376,205.535 h1.83
  text "Hit Count" at 258.225,205.535 h1.83
  text "Finished Hole Size" at 275.949,205.535 h1.83
  text "Plated" at 310.128,205.535 h1.83
  text "Hole Type" at 322.977,205.535 h1.83
  text "4" at 258.225,201.725 h1.52
  text "0.311mm (12.24mil)" at 275.949,201.725 h1.52
  text "PTH" at 310.128,201.725 h1.52
  text "Round" at 322.977,201.725 h1.52
  text "22" at 258.225,197.915 h1.52
  text "0.381mm (15.00mil)" at 275.949,197.915 h1.52
  text "PTH" at 310.128,197.915 h1.52
  text "Round" at 322.977,197.915 h1.52
  text "22" at 258.225,194.105 h1.52
  text "0.562mm (22.13mil)" at 275.949,194.105 h1.52
  text "PTH" at 310.128,194.105 h1.52
  text "Round" at 322.977,194.105 h1.52
  text "48 Total" at 258.225,190.295 h1.52